# Altium PCB 定时开关模块.PcbDoc
Units mm, origin at the board's own origin, x right, y up, seen from the top; angles counter-clockwise.
Board outline 152.4 x 101.6 mm, 2 copper layers (Top Layer, Bottom Layer); 22 components, 17 nets, 74 pads, 1 vias.
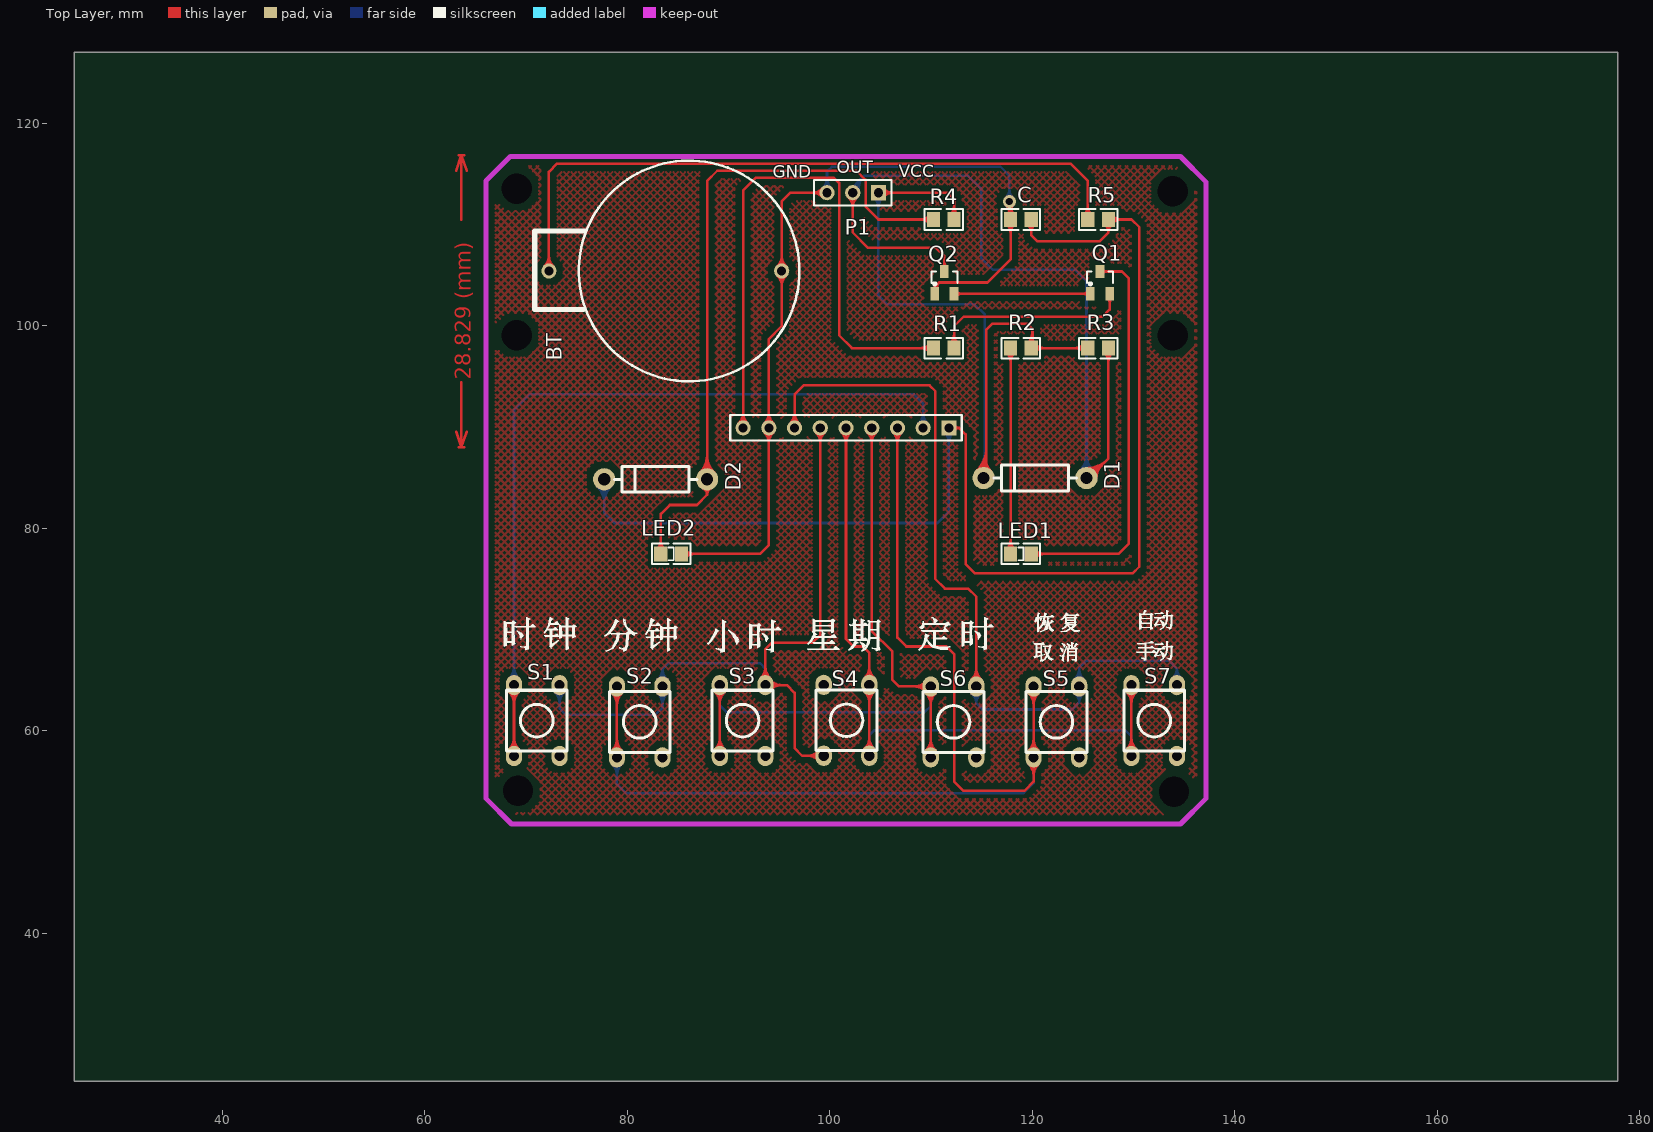
[diagram p0: Top Layer view]
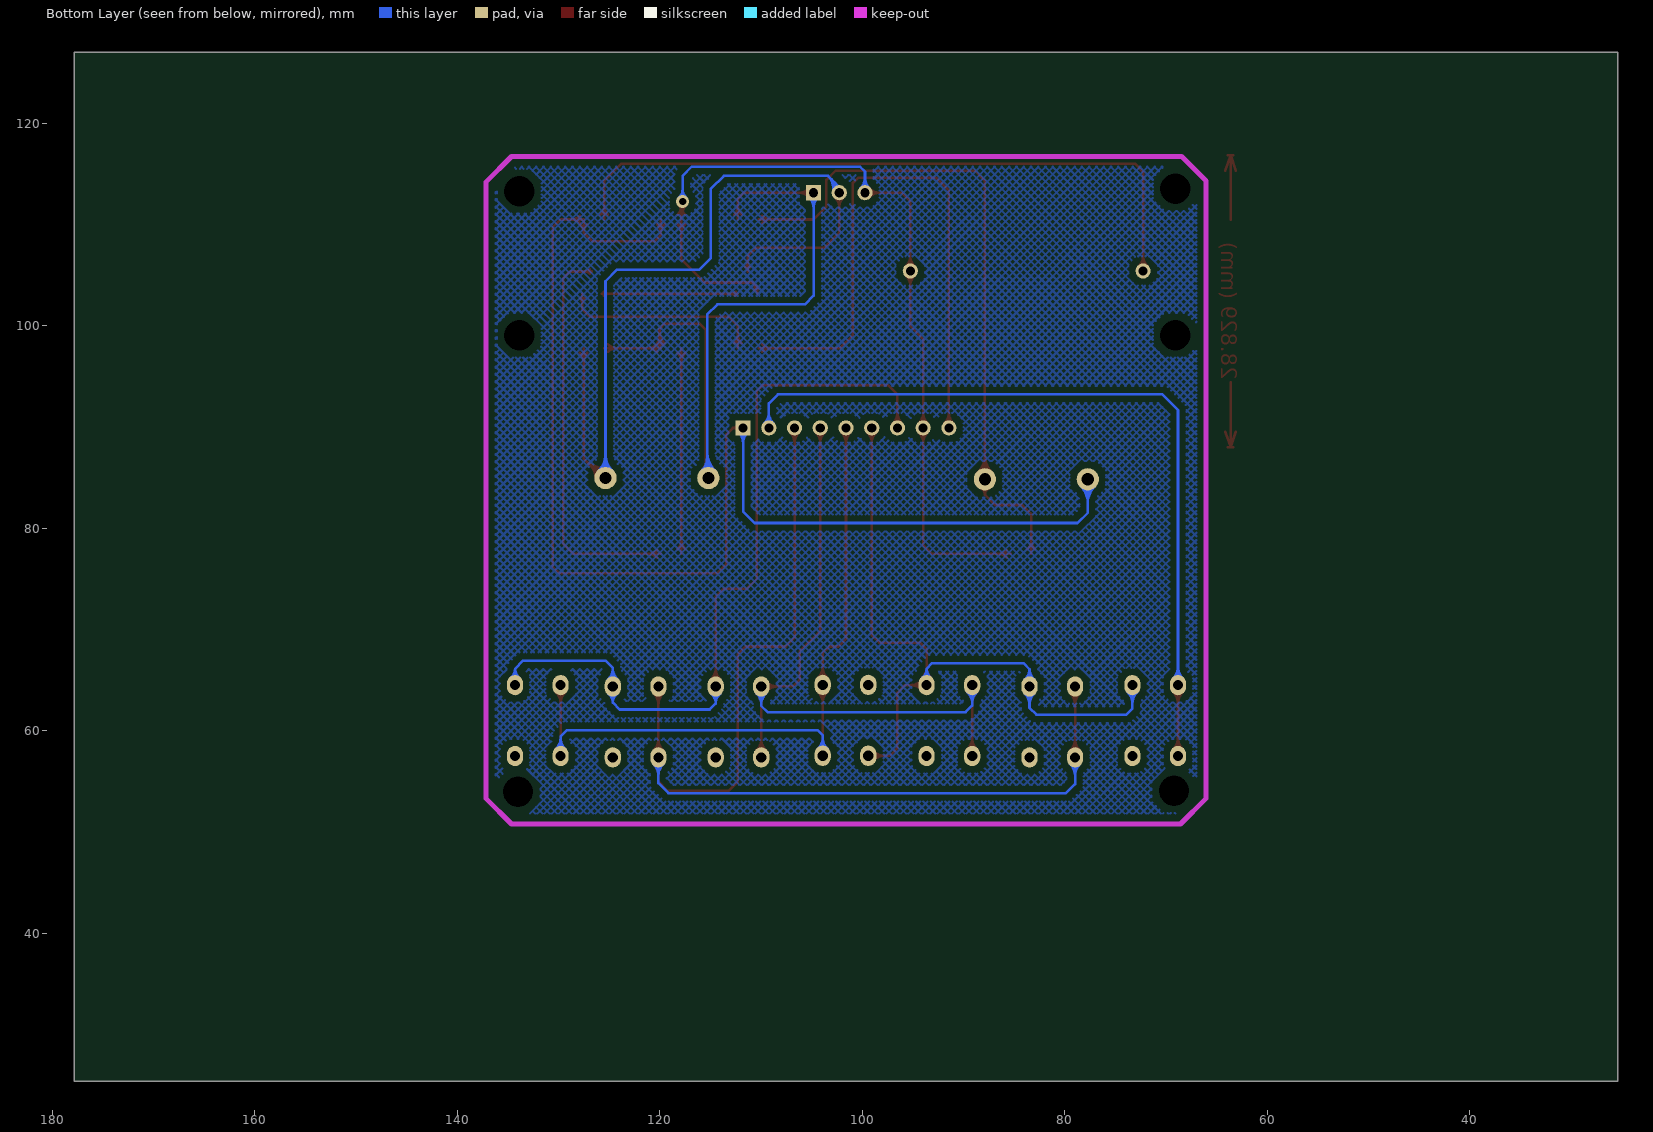
[diagram p1: Bottom Layer view, seen from below]

## Layer stack, top to bottom
Top Layer: signal copper 0.0356
Dielectric: dielectric 0.32, FR-4, Dk 4.8
Bottom Layer: signal copper 0.0356

## Board outline
25.4,25.4 177.8,25.4 177.8,127 25.4,127

## Design rules (kind name [scope] priority, off if disabled: settings)
Clearance [All] p1: gap=0.6
ComponentClearance [All] p1: gap=0.254 collisioncheckmode=3
PolygonConnect [All] p1: connectstyle=Relief reliefconductorwidth=0.254 reliefentries=4 polygonreliefangle="90 Angle"
RoutingTopology [All] p1: topology=Vertical
RoutingVias [All] p1: holewidth=0.711 width=1.27 viastyle="Through Hole" minholewidth=0.711 minwidth=1.27 maxholewidth=0.711 maxwidth=1.27
SolderMaskExpansion [All] p1: expansion=0.102
TestPointUsage [All] p1: valid=0 allowmultiple=FALSE
Testpoint [All] p1: side=15 testpointundercomponent=TRUE minsize=1.016 maxsize=2.54 preferedsize=1.524 minholesize=0 maxholesize=1.016 preferedholesize=0.813 testpointgrid=0.025 style=1023 order=-539222988
Width [All] p1: maxlimit=0.3 minlimit=0.254 preferedwidth=0.254
16 further rules are at their usual default settings.

## Components (designator, comment, footprint, x,y, rotation, side; value= is the part's Value field where it differs from the comment)
BT "Battery" PCBComponent_1 96.52,105.664 r90 top
C "Cap" TP-0805-R 121.412,109.22 r0 top
D1 "Diode 1N4007" diode0.4-D 125.349,84.963 r180 top
D2 "Diode 1N4007" diode0.4-D 87.884,84.836 r180 top
LED1 "LED1" TP-0805-D 121.412,76.2 r0 top
LED2 "LED1" TP-0805-D 86.868,76.2 r0 top
P1 "PZ_3" HDR-3 98.552,114.3 r180 top (schematic designator P?)
Q1 "2N3904" SO-G3 127.635,104.14 r0 top
Q2 "2N3904" SO-G3 112.268,104.14 r0 top
R1 "Res2" TP-0805-R 113.792,96.52 r0 top
R2 "Res2" TP-0805-R 116.332,99.06 r180 top
R3 "Res" TP-0805-R 123.952,99.06 r180 top
R4 "Res2" TP-0805-R 113.792,109.22 r0 top
R5 "" TP-0805-R 129.032,109.22 r0 top
S1 "SW-PB" an-6*6 76.2,67.183 r90 top
S2 "SW-PB" an-6*6 86.36,67.056 r90 top
S3 "SW-PB" an-6*6 96.52,67.183 r90 top
S4 "SW-PB" an-6*6 96.52,54.864 r270 top
S5 "SW-PB" an-6*6 127.508,67.056 r90 top
S6 "SW-PB" an-6*6 117.348,67.056 r90 top
S7 "SW-PB" an-6*6 137.16,67.183 r90 top
? "" HDR-9 96.52,89.916 r180 top

## Footprints (in the part's own frame and the unit in brackets; to place one, negate y for a bottom-side part, rotate by r counter-clockwise, add the part's x,y. Pads: shape width x height; smd on the part's side, far side on the other; paste and mask are expansions set on the pad)
an-6*6 [mm] "按键"
  oval 2x1.6 hole 1: 1(-9.675,7.381) 1(-2.675,7.381) 2(-9.675,2.881) 2(-2.675,2.881)
  silkscreen extent -9.17,2.13 -3.17,8.13
diode0.4-D [mm] "整流二极管"
  round 2.2 hole 1.2: 1(0,0) 2(10.16,0)
  silkscreen extent 1.02,-1.27 9.14,1.27
HDR-3 [mm] "3排针"
  rect 1.5x1.5 hole 0.9: 1(-6.253,1.165)
  round 1.5 hole 0.9: 2(-3.713,1.165) 3(-1.173,1.165)
  silkscreen extent -7.52,-0.11 0.1,2.43
HDR-9 [mm] "9排针"
  rect 1.5x1.5 hole 0.9: 1(-15.24,0)
  round 1.5 hole 0.9: 2(-12.7,0) 3(-10.16,0) 4(-7.62,0) 5(-5.08,0) 6(-2.54,0) 7(0,0) 8(2.54,0) 9(5.08,0)
  silkscreen extent -16.51,-1.27 6.35,1.27
PCBComponent_1 [mm]
  round 1.5 hole 0.9: 1(-0.254,24.257) 2(-0.254,1.27)
  silkscreen extent -11.15,-0.48 10.64,25.65
SO-G3 [mm] "贴片三极管"
  rect 0.85x1.3 smd: 1(-1.9,-0.983) 2(0,-0.983) 3(-0.95,1.217)
  silkscreen extent -2.23,-0.12 0.32,1.22
TP-0805-D [mm] "贴片二极管"
  rect 1.3x1.5 smd: 1(-3.556,1.27) 2(-1.524,1.27)
  silkscreen extent -4.44,0.25 -0.64,2.29
TP-0805-R [mm] "贴片0805"
  rect 1.3x1.5 smd: 1(-3.556,1.27) 2(-1.524,1.27)
  silkscreen extent -4.44,0.25 -0.64,2.29

## Part data
BT: "Multicell Battery"
C: "Capacitor"
D1 D2: "1 Amp General Purpose Rectifier"
LED1 LED2: "Typical RED GaAs LED"
P1: "排针——3"
Q1 Q2: "NPN General Purpose Amplifier"
R1 R2 R4: "Resistor"
R3 R5: library part Res2, "Resistor"
S1 S2 S3 S4 S5 S6 S7: "Switch"
?: library part Component_1

## Free pads (board coordinates)
  round 1.524 hole 3: 5(133.858,113.284) 6(133.985,53.975) 7(69.215,54.102) 8(69.088,113.538) 9(69.088,99.06) 10(133.858,99.06)

## Via types
v1: diameter 1.27, hole 0.711, Top Layer to Bottom Layer, 1 vias

## Nets (pads, with @x,y where several pads share a name; then routed paths per layer and width w, separated by ;. In a path a pad name is that pad's centre, name@x,y a point inside that pad or via, vN(x,y) a via of type N, cw(c..) or ccw(c..) an arc to the next point about the centre after c; other vN are vias at no path point)
GND: ?.8 BT.2 C.1 LED2.2 P1.3 Q2.1 | length 121.6
  Top Layer w0.254: LED2.2 93.091,77.47 93.98,78.359 93.98,98.679 95.25,99.949 95.25,112.268 96.117,113.135 P1.3 ; LED2.2@85.714,77.1 cw(c86.607,76.207) 86.607,77.47 cw(c86.607,78.733) LED2.2@85.714,77.84 ; ?.8@93.539,89.475 cw(c92.476,88.412) 93.98,88.412 cw(c95.484,88.412) ?.8@94.421,89.475 ; ?.8@93.539,90.357 ccw(c92.476,91.42) 93.98,91.42 ccw(c95.484,91.42) ?.8@94.421,90.357 ; ?.8@93.719,89.655 cw(c93.089,89.025) 93.98,89.025 cw(c94.871,89.025) ?.8@94.241,89.655 ; ?.8@93.719,90.177 ccw(c93.089,90.807) 93.98,90.807 ccw(c94.871,90.807) ?.8@94.241,90.177 ; BT.2@94.809,104.969 cw(c93.746,103.906) 95.25,103.906 cw(c96.754,103.906) BT.2@95.691,104.969 ; BT.2@94.809,105.851 ccw(c93.746,106.914) 95.25,106.914 ccw(c96.754,106.914) BT.2@95.691,105.851 ; BT.2@94.989,105.149 cw(c94.359,104.519) 95.25,104.519 cw(c96.141,104.519) BT.2@95.511,105.149 ; BT.2@94.989,105.671 ccw(c94.359,106.301) 95.25,106.301 ccw(c96.141,106.301) BT.2@95.511,105.671 ; P1.3@99.284,112.694 ccw(c98.221,111.631) 98.221,113.135 ccw(c98.221,114.639) P1.3@99.284,113.576 ; P1.3@99.464,112.874 ccw(c98.834,112.244) 98.834,113.135 ccw(c98.834,114.026) P1.3@99.464,113.396 ; Q2.1@110.254,103.658 ccw(c110.184,103.827) 110.368,103.827 ; Q2.1 110.368,103.827 ; Q2.1@110.409,103.398 cw(c110.925,103.6) 110.533,103.992 ; Q2.1@110.481,103.658 cw(c110.551,103.827) 110.368,103.827 ; Q2.1@110.645,103.491 cw(c111.32,103.755) 110.807,104.267 ; v1@117.37,111.909 cw(c116.196,110.735) C.1@117.856,110.735 ; C.1@117.486,110.02 cw(c116.593,109.127) 117.856,109.127 cw(c119.119,109.127) C.1@118.226,110.02 ; C.1@117.486,110.96 ccw(c116.593,111.853) 117.856,111.853 ccw(c119.119,111.853) C.1@118.226,110.96 ; v1@117.549,112.088 cw(c116.809,111.348) 117.856,111.348 cw(c118.649,111.348) v1@118.088,111.909 ; v1(117.729,112.268) 117.856,112.141 117.856,106.553 115.57,104.267 110.807,104.267 ; 110.368,103.827 110.807,104.267
  Bottom Layer w0.254: P1.3@99.284,113.576 ccw(c98.221,114.639) 99.725,114.639 ccw(c101.229,114.639) P1.3@100.166,113.576 ; P1.3@99.464,113.396 ccw(c98.834,114.026) 99.725,114.026 ccw(c100.616,114.026) P1.3@99.986,113.396 ; P1.3 99.725,115.219 100.203,115.697 116.84,115.697 117.729,114.808 v1(117.729,112.268) ; v1@117.37,112.627 ccw(c116.503,113.494) 117.729,113.494 ccw(c118.955,113.494) v1@118.088,112.627
Net_1: ?.1 C.2 D2.2 R5.2 | length 145.7
  Top Layer w0.254: ?.1 112.776,89.916 ; ?.1@112.315,89.633 cw(c112.776,89.399) 112.776,89.916 ; ?.1@112.315,90.199 ccw(c112.776,90.433) 112.776,89.916 ; C.2@119.518,110.02 cw(c118.625,109.127) 119.888,109.127 cw(c121.151,109.127) C.2@120.258,110.02 ; C.2 119.888,108.966 120.523,108.331 126.619,108.331 127.508,109.22 ; R5.2@127.159,110 cw(c126.461,109.22) 127.508,109.22 ; R5.2@127.857,110 ccw(c128.555,109.22) 127.508,109.22 ; R5.2@127.878,110.12 cw(c128.771,109.227) 128.771,110.49 cw(c128.771,111.753) R5.2@127.878,110.86 ; 112.776,89.916 113.411,89.281 113.411,76.454 114.3,75.565 129.921,75.565 130.556,76.2 130.556,109.728 129.794,110.49 R5.2 127.508,109.22
  Bottom Layer w0.254: D2.2@77.036,84.148 cw(c75.375,82.487) 77.724,82.487 cw(c80.073,82.487) D2.2@78.412,84.148 ; D2.2@77.216,84.328 cw(c75.988,83.1) 77.724,83.1 cw(c79.46,83.1) D2.2@78.232,84.328 ; D2.2@77.395,84.507 cw(c76.601,83.713) 77.724,83.713 cw(c78.847,83.713) D2.2@78.053,84.507 ; D2.2 77.724,81.534 78.74,80.518 110.617,80.518 111.76,81.661 ?.1 ; ?.1@111.319,89.475 cw(c110.256,88.412) 111.76,88.412 cw(c113.264,88.412) ?.1@112.201,89.475 ; ?.1@111.499,89.655 cw(c110.869,89.025) 111.76,89.025 cw(c112.651,89.025) ?.1@112.021,89.655
Net_2: ?.2 S1.1 | length 94.2
  Top Layer w0.254: S1.1@68.343,58.184 ccw(c67.194,59.333) 68.819,59.333 ccw(c70.444,59.333) S1.1@69.295,58.184 ; S1.1@68.343,63.832 cw(c67.194,62.683) 68.819,62.683 cw(c70.444,62.683) S1.1@69.295,63.832 ; S1.1@68.523,58.004 ccw(c67.808,58.72) 68.819,58.72 ccw(c69.831,58.72) S1.1@69.115,58.004 ; S1.1@68.523,64.012 cw(c67.808,63.296) 68.819,63.296 cw(c69.831,63.296) S1.1@69.115,64.012 ; S1.1@68.819,57.508 S1.1@68.819,64.508
  Bottom Layer w0.254: S1.1@68.343,65.184 ccw(c67.194,66.333) 68.819,66.333 ccw(c70.444,66.333) S1.1@69.295,65.184 ; S1.1@68.523,65.004 ccw(c67.808,65.72) 68.819,65.72 ccw(c69.831,65.72) S1.1@69.115,65.004 ; S1.1@68.819,64.508 68.819,91.679 70.358,93.218 108.331,93.218 109.22,92.329 ?.2 ; ?.2@108.779,90.357 ccw(c107.716,91.42) 109.22,91.42 ccw(c110.724,91.42) ?.2@109.661,90.357 ; ?.2@108.959,90.177 ccw(c108.329,90.807) 109.22,90.807 ccw(c110.111,90.807) ?.2@109.481,90.177
Net_3: ?.3 S2.1 S5.1 | length 144.4
  Top Layer w0.254: S2.1@78.503,58.057 ccw(c77.354,59.206) 78.979,59.206 ccw(c80.604,59.206) S2.1@79.455,58.057 ; S2.1@78.503,63.705 cw(c77.354,62.556) 78.979,62.556 cw(c80.604,62.556) S2.1@79.455,63.705 ; S2.1@78.683,57.877 ccw(c77.968,58.593) 78.979,58.593 ccw(c79.991,58.593) S2.1@79.275,57.877 ; S2.1@78.683,63.885 cw(c77.968,63.169) 78.979,63.169 cw(c79.991,63.169) S2.1@79.275,63.885 ; S2.1@78.979,57.381 S2.1@78.979,64.381 ; ?.3@106.239,89.475 cw(c105.176,88.412) 106.68,88.412 cw(c108.184,88.412) ?.3@107.121,89.475 ; ?.3@106.419,89.655 cw(c105.789,89.025) 106.68,89.025 cw(c107.571,89.025) ?.3@106.941,89.655 ; ?.3 106.68,69.215 107.569,68.326 111.506,68.326 112.268,67.564 112.268,54.991 113.157,54.102 119.253,54.102 120.127,54.976 S5.1@120.127,64.381 ; S5.1@119.651,56.705 cw(c118.502,55.556) 120.127,55.556 cw(c121.752,55.556) S5.1@120.603,56.705 ; S5.1@119.651,58.057 ccw(c118.502,59.206) 120.127,59.206 ccw(c121.752,59.206) S5.1@120.603,58.057 ; S5.1@119.651,63.705 cw(c118.502,62.556) 120.127,62.556 cw(c121.752,62.556) S5.1@120.603,63.705 ; S5.1@119.831,56.885 cw(c119.116,56.169) 120.127,56.169 cw(c121.139,56.169) S5.1@120.423,56.885 ; S5.1@119.831,57.877 ccw(c119.116,58.593) 120.127,58.593 ccw(c121.139,58.593) S5.1@120.423,57.877 ; S5.1@119.831,63.885 cw(c119.116,63.169) 120.127,63.169 cw(c121.139,63.169) S5.1@120.423,63.885
  Bottom Layer w0.254: S2.1@78.503,56.705 cw(c77.354,55.556) 78.979,55.556 cw(c80.604,55.556) S2.1@79.455,56.705 ; S2.1@78.683,56.885 cw(c77.968,56.169) 78.979,56.169 cw(c79.991,56.169) S2.1@79.275,56.885 ; S2.1@78.979,57.381 78.979,54.752 79.883,53.848 119.126,53.848 120.127,54.849 S5.1@120.127,57.381 ; S5.1@119.651,56.705 cw(c118.502,55.556) 120.127,55.556 cw(c121.752,55.556) S5.1@120.603,56.705 ; S5.1@119.831,56.885 cw(c119.116,56.169) 120.127,56.169 cw(c121.139,56.169) S5.1@120.423,56.885
Net_4: ?.4 S3.1 S6.1 | length 101.8
  Top Layer w0.254: S3.1@88.663,58.184 ccw(c87.514,59.333) 89.139,59.333 ccw(c90.764,59.333) S3.1@89.615,58.184 ; S3.1@88.663,63.832 cw(c87.514,62.683) 89.139,62.683 cw(c90.764,62.683) S3.1@89.615,63.832 ; S3.1@88.843,58.004 ccw(c88.128,58.72) 89.139,58.72 ccw(c90.151,58.72) S3.1@89.435,58.004 ; S3.1@88.843,64.012 cw(c88.128,63.296) 89.139,63.296 cw(c90.151,63.296) S3.1@89.435,64.012 ; S3.1@89.139,57.508 S3.1@89.139,64.508 ; ?.4@103.699,89.475 cw(c102.636,88.412) 104.14,88.412 cw(c105.644,88.412) ?.4@104.581,89.475 ; ?.4@103.879,89.655 cw(c103.249,89.025) 104.14,89.025 cw(c105.031,89.025) ?.4@104.401,89.655 ; ?.4 104.14,69.85 106.172,67.818 106.172,65.024 106.815,64.381 109.967,64.381 S6.1@109.967,57.381 ; S6.1@109.491,58.057 ccw(c108.342,59.206) 109.967,59.206 ccw(c111.592,59.206) S6.1@110.443,58.057 ; S6.1@109.491,63.705 cw(c108.342,62.556) 109.967,62.556 cw(c111.592,62.556) S6.1@110.443,63.705 ; S6.1@109.491,63.905 ccw(c108.342,62.756) 108.342,64.381 ccw(c108.342,66.006) S6.1@109.491,64.857 ; S6.1@109.671,57.877 ccw(c108.956,58.593) 109.967,58.593 ccw(c110.979,58.593) S6.1@110.263,57.877 ; S6.1@109.671,63.885 cw(c108.956,63.169) 109.967,63.169 cw(c110.979,63.169) S6.1@110.263,63.885 ; S6.1@109.671,64.085 ccw(c108.956,63.369) 108.956,64.381 ccw(c108.956,65.393) S6.1@109.671,64.677
  Bottom Layer w0.254: S3.1@88.663,63.832 cw(c87.514,62.683) 89.139,62.683 cw(c90.764,62.683) S3.1@89.615,63.832 ; S3.1@88.843,64.012 cw(c88.128,63.296) 89.139,63.296 cw(c90.151,63.296) S3.1@89.435,64.012 ; S3.1@89.139,64.508 89.139,62.499 89.789,61.849 109.347,61.849 109.967,62.469 S6.1@109.967,64.381 ; S6.1@109.491,63.705 cw(c108.342,62.556) 109.967,62.556 cw(c111.592,62.556) S6.1@110.443,63.705 ; S6.1@109.671,63.885 cw(c108.956,63.169) 109.967,63.169 cw(c110.979,63.169) S6.1@110.263,63.885
Net_5: ?.5 S4.1 S7.1 | length 103.9
  Top Layer w0.254: ?.5@101.159,89.475 cw(c100.096,88.412) 101.6,88.412 cw(c103.104,88.412) ?.5@102.041,89.475 ; ?.5@101.339,89.655 cw(c100.709,89.025) 101.6,89.025 cw(c102.491,89.025) ?.5@101.861,89.655 ; ?.5 101.6,69.088 102.362,68.326 103.251,68.326 103.901,67.676 S4.1@103.901,57.539 ; S4.1@103.425,58.215 ccw(c102.276,59.364) 103.901,59.364 ccw(c105.526,59.364) S4.1@104.377,58.215 ; S4.1@103.425,63.863 cw(c102.276,62.714) 103.901,62.714 cw(c105.526,62.714) S4.1@104.377,63.863 ; S4.1@103.425,65.215 ccw(c102.276,66.364) 103.901,66.364 ccw(c105.526,66.364) S4.1@104.377,65.215 ; S4.1@103.605,58.035 ccw(c102.889,58.751) 103.901,58.751 ccw(c104.912,58.751) S4.1@104.197,58.035 ; S4.1@103.605,64.043 cw(c102.889,63.327) 103.901,63.327 cw(c104.912,63.327) S4.1@104.197,64.043 ; S4.1@103.605,65.035 ccw(c102.889,65.751) 103.901,65.751 ccw(c104.912,65.751) S4.1@104.197,65.035 ; S7.1@129.303,58.184 ccw(c128.154,59.333) 129.779,59.333 ccw(c131.404,59.333) S7.1@130.255,58.184 ; S7.1@129.303,63.832 cw(c128.154,62.683) 129.779,62.683 cw(c131.404,62.683) S7.1@130.255,63.832 ; S7.1@129.483,58.004 ccw(c128.768,58.72) 129.779,58.72 ccw(c130.791,58.72) S7.1@130.075,58.004 ; S7.1@129.483,64.012 cw(c128.768,63.296) 129.779,63.296 cw(c130.791,63.296) S7.1@130.075,64.012 ; S7.1@129.779,57.508 S7.1@129.779,64.508
  Bottom Layer w0.254: S4.1@103.425,58.215 ccw(c102.276,59.364) 103.901,59.364 ccw(c105.526,59.364) S4.1@104.377,58.215 ; S4.1@103.605,58.035 ccw(c102.889,58.751) 103.901,58.751 ccw(c104.912,58.751) S4.1@104.197,58.035 ; S4.1@103.901,57.539 103.901,59.578 104.394,60.071 129.159,60.071 129.779,59.451 S7.1@129.779,57.508 ; S7.1@129.303,58.184 ccw(c128.154,59.333) 129.779,59.333 ccw(c131.404,59.333) S7.1@130.255,58.184 ; S7.1@129.483,58.004 ccw(c128.768,58.72) 129.779,58.72 ccw(c130.791,58.72) S7.1@130.075,58.004
Net_6: ?.6 S1.2@73.319,64.508 S2.2@83.479,64.381 S3.2@93.639,64.508 S4.2@99.401,57.539 | length 102.4
  Top Layer w0.254: S3.2@93.163,65.184 ccw(c92.014,66.333) 93.639,66.333 ccw(c95.264,66.333) S3.2@94.115,65.184 ; S3.2@93.343,65.004 ccw(c92.628,65.72) 93.639,65.72 ccw(c94.651,65.72) S3.2@93.935,65.004 ; S3.2@93.935,64.212 cw(c94.651,63.496) 94.651,64.508 cw(c94.651,65.52) S3.2@93.935,64.804 ; S3.2@94.115,64.032 cw(c95.264,62.883) 95.264,64.508 cw(c95.264,66.133) S3.2@94.115,64.984 ; ?.6@98.619,89.475 cw(c97.556,88.412) 99.06,88.412 cw(c100.564,88.412) ?.6@99.501,89.475 ; ?.6@98.799,89.655 cw(c98.169,89.025) 99.06,89.025 cw(c99.951,89.025) ?.6@99.321,89.655 ; S4.2@98.925,57.063 ccw(c97.776,55.914) 97.776,57.539 ccw(c97.776,59.164) S4.2@98.925,58.015 ; ?.6 99.06,69.469 98.298,68.707 94.274,68.707 93.639,68.072 93.639,64.508 95.766,64.508 96.52,63.754 96.52,58.293 97.274,57.539 S4.2@99.401,57.539 ; S4.2@99.105,57.243 ccw(c98.389,56.527) 98.389,57.539 ccw(c98.389,58.551) S4.2@99.105,57.835
  Bottom Layer w0.254: S1.2@72.843,63.832 cw(c71.694,62.683) 73.319,62.683 cw(c74.944,62.683) S1.2@73.795,63.832 ; S1.2@73.023,64.012 cw(c72.308,63.296) 73.319,63.296 cw(c74.331,63.296) S1.2@73.615,64.012 ; S1.2@73.319,64.508 73.319,62.19 73.914,61.595 82.804,61.595 83.479,62.27 83.479,66.08 ; S2.2@83.003,63.705 cw(c81.854,62.556) 83.479,62.556 cw(c85.104,62.556) S2.2@83.955,63.705 ; S2.2@83.032,65.084 ccw(c82.146,66.08) 83.479,66.08 ; S2.2@83.183,63.885 cw(c82.468,63.169) 83.479,63.169 cw(c84.491,63.169) S2.2@83.775,63.885 ; S2.2@83.201,64.894 ccw(c82.649,65.514) 83.479,65.514 ccw(c84.309,65.514) S2.2@83.758,64.894 ; S2.2@83.926,65.084 cw(c84.812,66.08) 83.479,66.08 ; S3.2@93.213,65.229 ccw(c92.48,66.127) 93.639,66.127 ; S3.2@93.374,65.033 ccw(c92.918,65.591) 93.639,65.591 ccw(c94.361,65.591) S3.2@93.904,65.033 ; S3.2@93.639,64.508 93.639,66.127 ; S3.2@94.065,65.229 cw(c94.798,66.127) 93.639,66.127 ; 83.479,66.08 84.074,66.675 93.091,66.675 93.639,66.127
Net_7: ?.7 S5.2@124.627,64.381 S6.2@114.467,64.381 S7.2@134.279,64.508 | length 99.9
  Top Layer w0.254: ?.7@96.079,90.357 ccw(c95.016,91.42) 96.52,91.42 ccw(c98.024,91.42) ?.7@96.961,90.357 ; ?.7@96.259,90.177 ccw(c95.629,90.807) 96.52,90.807 ccw(c97.411,90.807) ?.7@96.781,90.177 ; ?.7 96.52,93.218 97.409,94.107 109.855,94.107 110.414,93.548 110.414,75.006 111.379,74.041 113.665,74.041 114.467,73.239 S6.2@114.467,64.381 ; S6.2@113.991,65.057 ccw(c112.842,66.206) 114.467,66.206 ccw(c116.092,66.206) S6.2@114.943,65.057 ; S6.2@114.171,64.877 ccw(c113.456,65.593) 114.467,65.593 ccw(c115.479,65.593) S6.2@114.763,64.877
  Bottom Layer w0.254: S6.2@114.024,63.675 cw(c113.169,62.698) 114.467,62.698 ; S6.2@114.191,63.866 cw(c113.659,63.258) 114.467,63.258 cw(c115.275,63.258) S6.2@114.743,63.866 ; S6.2@114.467,64.381 114.467,62.698 ; S6.2@114.91,63.675 ccw(c115.765,62.698) 114.467,62.698 ; S5.2@124.151,65.057 ccw(c123.002,66.206) 124.627,66.206 ccw(c126.252,66.206) S5.2@125.103,65.057 ; S5.2@124.206,63.656 cw(c123.502,62.778) 124.627,62.778 ; S5.2@124.331,64.877 ccw(c123.616,65.593) 124.627,65.593 ccw(c125.639,65.593) S5.2@124.923,64.877 ; S5.2@124.365,63.854 cw(c123.927,63.308) 124.627,63.308 cw(c125.328,63.308) S5.2@124.889,63.854 ; S5.2@125.048,63.656 ccw(c125.753,62.778) 124.627,62.778 ; S7.2@133.853,65.229 ccw(c133.12,66.127) 134.279,66.127 ; S7.2@134.014,65.033 ccw(c133.558,65.591) 134.279,65.591 ccw(c135.001,65.591) S7.2@134.544,65.033 ; S7.2@134.279,64.508 134.279,66.127 ; S7.2@134.705,65.229 cw(c135.438,66.127) 134.279,66.127 ; 114.467,62.698 115.062,62.103 123.952,62.103 124.627,62.778 ; 124.627,62.778 124.627,66.207 125.349,66.929 133.477,66.929 134.279,66.127
Net_9: ?.9 R1.1 | length 64.3
  Top Layer w0.254: ?.9@90.999,90.357 ccw(c89.936,91.42) 91.44,91.42 ccw(c92.944,91.42) ?.9@91.881,90.357 ; ?.9@91.179,90.177 ccw(c90.549,90.807) 91.44,90.807 ccw(c92.331,90.807) ?.9@91.701,90.177 ; ?.9 91.44,113.36 92.71,114.63 100.381,114.63 100.914,114.097 100.914,99.06 102.184,97.79 R1.1 ; R1.1@109.866,97.42 ccw(c108.973,96.527) 108.973,97.79 ccw(c108.973,99.053) R1.1@109.866,98.16
NetBT_1: BT.1 R5.1 | length 73.6
  Top Layer w0.254: BT.1@71.822,105.851 ccw(c70.759,106.914) 72.263,106.914 ccw(c73.767,106.914) BT.1@72.704,105.851 ; BT.1@72.002,105.671 ccw(c71.372,106.301) 72.263,106.301 ccw(c73.154,106.301) BT.1@72.524,105.671 ; BT.1 72.263,115.189 73.076,116.002 123.774,116.002 125.476,114.3 R5.1 ; R5.1@125.106,110.96 ccw(c124.213,111.853) 125.476,111.853 ccw(c126.739,111.853) R5.1@125.846,110.96
NetD2_1: D2.1 LED2.1 R4.1 | length 81.5
  Top Layer w0.254: LED2.1@82.942,77.94 ccw(c82.049,78.833) 83.312,78.833 ccw(c84.575,78.833) LED2.1@83.682,77.94 ; LED2.1 83.312,81.407 84.201,82.296 86.868,82.296 87.884,83.312 ; D2.1@87.196,85.524 ccw(c85.535,87.185) 87.884,87.185 ccw(c90.233,87.185) D2.1@88.572,85.524 ; D2.1@87.376,85.344 ccw(c86.148,86.572) 87.884,86.572 ccw(c89.62,86.572) D2.1@88.392,85.344 ; D2.1@87.475,83.953 cw(c87.177,83.312) 87.884,83.312 ; D2.1@87.555,85.165 ccw(c86.761,85.959) 87.884,85.959 ccw(c89.007,85.959) D2.1@88.213,85.165 ; D2.1@87.581,84.184 cw(c87.362,83.71) 87.884,83.71 cw(c88.406,83.71) D2.1@88.187,84.184 ; D2.1@88.293,83.953 ccw(c88.591,83.312) 87.884,83.312 ; R4.1@109.866,110.12 ccw(c108.973,109.227) 108.973,110.49 ccw(c108.973,111.753) R4.1@109.866,110.86 ; R4.1 104.8,110.49 103.53,111.76 103.53,114.392 102.619,115.303 88.887,115.303 87.884,114.3 87.884,83.312
NetLED1_1: LED1.1 R2.2 | length 24.3
  Top Layer w0.254: LED1.1@117.486,77.94 ccw(c116.593,78.833) 117.856,78.833 ccw(c119.119,78.833) LED1.1@118.226,77.94 ; R2.2@117.486,97.32 cw(c116.593,96.427) 117.856,96.427 cw(c119.119,96.427) R2.2@118.226,97.32 ; LED1.1 R2.2
NetLED1_2: LED1.2 Q1.3 | length 42.5
  Top Layer w0.254: LED1.2 128.524,77.47 129.54,78.486 129.54,104.648 128.831,105.357 Q1.3 ; LED1.2@120.258,77.1 cw(c121.151,76.207) 121.151,77.47 cw(c121.151,78.733) LED1.2@120.258,77.84 ; Q1.3@126.896,105.146 cw(c127.404,104.638) 127.404,105.357 cw(c127.404,106.077) Q1.3@126.896,105.568
NetQ1_1: Q1.1 Q2.2 | length 15.7
  Top Layer w0.254: Q2.2 Q1.1 ; Q2.2@112.479,102.946 cw(c112.987,102.438) 112.987,103.157 cw(c112.987,103.877) Q2.2@112.479,103.368 ; Q1.1@125.524,102.946 ccw(c125.015,102.438) 125.015,103.157 ccw(c125.015,103.877) Q1.1@125.524,103.368
NetQ1_2: Q1.2 R1.2 | length 22.9
  Top Layer w0.254: R1.2@111.898,98.26 ccw(c111.005,99.153) 112.268,99.153 ccw(c113.531,99.153) R1.2@112.638,98.26 ; R1.2 112.268,99.949 113.208,100.889 126.924,100.889 127.635,101.6 Q1.2 ; Q1.2@127.424,102.721 cw(c126.915,102.213) 127.635,102.213 cw(c128.354,102.213) Q1.2@127.846,102.721
OUT: D1.1 P1.2 Q2.3 R3.1 | length 108.1
  Top Layer w0.254: P1.2@101.824,112.694 cw(c100.761,111.631) 102.265,111.631 cw(c103.769,111.631) P1.2@102.706,112.694 ; P1.2@102.004,112.874 cw(c101.374,112.244) 102.265,112.244 cw(c103.156,112.244) P1.2@102.526,112.874 ; P1.2 102.265,109.22 103.789,107.696 110.49,107.696 111.318,106.868 Q2.3 ; Q2.3@111.107,105.793 ccw(c110.598,106.302) 111.318,106.302 ccw(c112.037,106.302) Q2.3@111.529,105.793 ; D1.1@125.349,85.428 ccw(c125.349,87.164) 126.576,85.936 ; D1.1@125.349,85.682 ccw(c125.349,88.031) 127.01,86.37 ; D1.1@125.349,85.936 ccw(c125.349,88.898) 127.444,86.804 ; D1.1@125.476,84.836 127.508,86.868 R3.1 ; D1.1@126.068,84.963 cw(c127.191,84.963) 126.397,85.757 ; D1.1@126.322,84.963 cw(c128.058,84.963) 126.83,86.19 ; R3.1@127.138,97.32 cw(c126.245,96.427) 127.508,96.427 cw(c128.771,96.427) R3.1@127.878,97.32
  Bottom Layer w0.254: P1.2 102.265,113.695 103.378,114.808 ; P1.2@102.378,113.154 cw(c103.458,113.339) 102.684,114.114 ; P1.2@102.629,113.197 cw(c104.051,113.44) 103.031,114.461 ; P1.2@102.879,113.24 cw(c104.644,113.542) 103.378,114.808 ; D1.1@124.661,85.651 ccw(c123,87.312) 125.349,87.312 ccw(c127.698,87.312) D1.1@126.037,85.651 ; D1.1@124.841,85.471 ccw(c123.613,86.699) 125.349,86.699 ccw(c127.085,86.699) D1.1@125.857,85.471 ; D1.1@125.02,85.292 ccw(c124.226,86.086) 125.349,86.086 ccw(c126.472,86.086) D1.1@125.678,85.292 ; D1.1 125.349,104.394 124.206,105.537 116.078,105.537 114.935,106.68 114.935,113.538 113.665,114.808 103.378,114.808
VCC: D1.2 P1.1 R2.1 R3.2 R4.2 | length 107.8
  Top Layer w0.254: P1.1 111.655,113.135 112.268,112.522 R4.2 ; P1.1@105.066,112.874 cw(c105.696,112.244) 105.696,113.135 cw(c105.696,114.026) P1.1@105.066,113.396 ; P1.1@105.246,112.694 cw(c106.309,111.631) 106.309,113.135 cw(c106.309,114.639) P1.1@105.246,113.576 ; R4.2@111.898,110.96 ccw(c111.005,111.853) 112.268,111.853 ccw(c113.531,111.853) R4.2@112.638,110.96 ; D1.2@114.501,85.651 ccw(c112.227,87.925) 115.443,87.925 ; D1.2@114.681,85.471 ccw(c112.84,87.312) 115.443,87.312 ; D1.2@114.86,85.292 ccw(c113.453,86.699) 115.443,86.699 ccw(c116.925,86.699) D1.2@115.877,85.651 ; D1.2@115.04,85.112 ccw(c114.066,86.086) 115.443,86.086 ccw(c116.312,86.086) D1.2@115.697,85.471 ; D1.2@115.316,84.836 115.443,84.963 115.443,99.568 116.078,100.203 119.507,100.203 120.015,99.695 R2.1@120.015,97.79 ; R2.1@119.518,98.26 ccw(c118.319,99.459) 120.015,99.459 ; R2.1@119.698,98.08 ccw(c118.932,98.846) 120.015,98.846 ccw(c120.844,98.846) R2.1@120.258,98.26 ; R2.1 R3.2 ; R2.1@120.258,97.42 cw(c121.151,96.527) 121.151,97.79 cw(c121.151,99.053) R2.1@120.258,98.16 ; R3.2@125.106,97.42 ccw(c124.213,96.527) 124.213,97.79 ccw(c124.213,99.053) R3.2@125.106,98.16
  Bottom Layer w0.254: P1.1@104.364,112.694 cw(c103.301,111.631) 104.805,111.631 cw(c106.309,111.631) P1.1@105.246,112.694 ; P1.1@104.544,112.874 cw(c103.914,112.244) 104.805,112.244 cw(c105.696,112.244) P1.1@105.066,112.874 ; P1.1 104.805,102.967 105.664,102.108 114.3,102.108 115.316,101.092 D1.2@115.316,84.836 ; D1.2@114.501,85.651 ccw(c112.533,87.619) 115.316,87.619 ; D1.2@114.681,85.471 ccw(c113.147,87.005) 115.316,87.005 ccw(c117.231,87.005) D1.2@115.877,85.651 ; D1.2@114.86,85.292 ccw(c113.76,86.392) 115.316,86.392 ccw(c116.618,86.392) D1.2@115.697,85.471
pads on no net: S1.2@73.319,57.508 S2.2@83.479,57.381 S3.2@93.639,57.508 S4.2@99.401,64.539 S5.2@124.627,57.381 S6.2@114.467,57.381 S7.2@134.279,57.508
copper on no net: | length 20.2
  Top Layer w0.254: 63.119,89.535 63.627,88.011 ; 63.119,115.316 63.627,116.84 ; 63.373,88.011 63.881,88.011 ; 63.373,116.84 63.881,116.84 ; 63.627,94.402 63.627,88.011 ; 63.627,110.449 63.627,116.84 ; 64.135,89.535 63.627,88.011 ; 64.135,115.316 63.627,116.84

## Polygon pours and split planes (outlines as drawn)
no net on Top Layer (hatched 45Degree grid 0.508 track 0.203): 68.707,116.078 66.675,114.046 66.675,53.721 68.707,51.689 134.366,51.689 136.525,53.848 136.525,113.792 134.112,116.205 68.707,116.205
no net on Bottom Layer (hatched 45Degree grid 0.508 track 0.203): 66.802,114.554 66.802,53.848 68.834,51.816 133.985,51.816 136.398,54.229 136.398,113.665 134.366,115.697 68.834,115.697 67.437,114.3 66.675,114.3

## Keep-outs
Keep-Out Layer:
  lines w0.5: 66.04,53.34 68.58,50.8 134.62,50.8 137.16,53.34 137.16,114.173 134.62,116.713 68.707,116.713 68.453,116.713 66.04,114.3 66.04,109.22 66.04,53.34

## Other copper
Top Layer:
  text "28.829 (mm)" at 64.541,94.656 h1.52 r90

## Silkscreen, mask and mechanical layers (free items; w line width, h text height)
Top Overlay:
  drawing of 2568 lines, arcs and shapes, not listed
  text "OUT" at 100.711,115.062 h1.22
  text "VCC" at 106.807,114.681 h1.22
  text "GND" at 94.361,114.63 h1.22
Mechanical 1:
  lines w0.254: 65.947,120.462 65.949,120.97 ; 67.47,120.204 65.948,120.716 ; 67.473,121.22 65.948,120.716 ; 93.022,120.643 65.948,120.716 ; 110.086,120.596 137.16,120.523 ; 135.635,120.019 137.16,120.523 ; 135.637,121.035 137.16,120.523 ; 137.159,120.269 137.161,120.777 ; 139.576,115.95 140.081,117.475 ; 139.697,51.942 140.208,50.419 ; 139.827,117.475 140.335,117.475 ; 139.954,50.419 140.462,50.42 ; 140.128,92.606 140.081,117.475 ; 140.161,75.288 140.208,50.419 ; 140.592,115.952 140.081,117.475 ; 140.713,51.944 140.208,50.419
  lines w0.5: 66.04,53.34 68.58,50.8 134.62,50.8 137.16,53.34 137.16,114.3 ; 66.13,105.537 66.04,105.627 66.04,114.3 ; 66.13,110.236 66.13,53.43 ; 66.13,114.39 66.13,53.43 ; 66.04,114.3 68.58,116.84 ; 66.04,114.3 68.58,116.84 ; 66.13,53.43 68.58,50.98 134.546,50.98 136.906,53.34 137.16,53.594 137.16,114.3 ; 68.58,116.84 134.62,116.84 ; 68.58,116.84 114.3,116.84 134.62,116.84 ; 134.62,116.84 137.16,114.3 ; 134.62,116.84 137.16,114.3
  text "71.2124 (mm)" at 93.274,119.728 h1.52 r359.84
  text "67.0561 (mm)" at 139.214,92.35 h1.52 r270.11